# Altium PCB StuderA80ReproExtend_V0.2_RCA.PcbDoc
Units mil, origin at the board's own origin, x right, y up, seen from the top; angles counter-clockwise.
Board outline 8780 x 3200 mil, 2 copper layers (Top Layer, Bottom Layer); 6 components, 4 nets, 25 pads, 2 vias.
Unrouted connection lines stored in the file: 2.
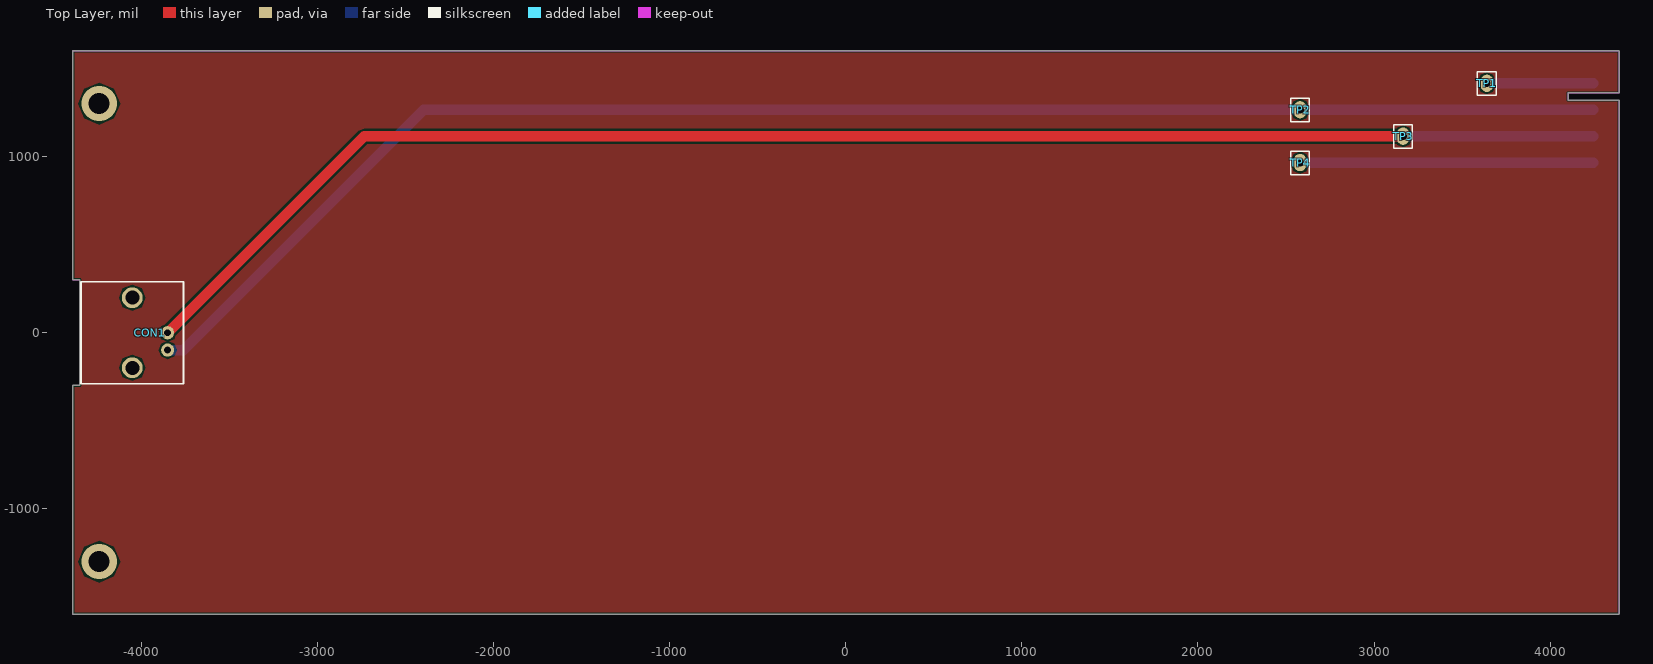
[diagram p0: Top Layer view]
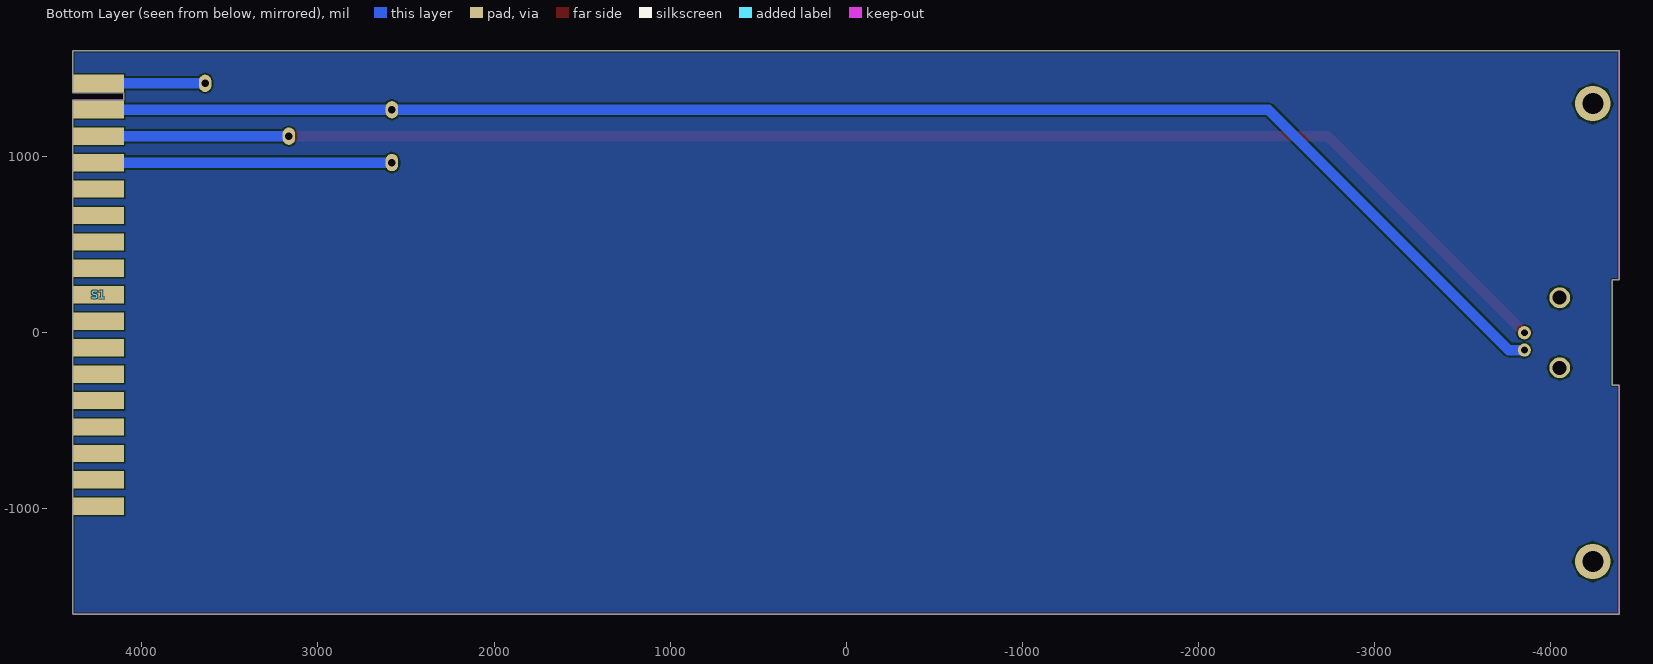
[diagram p1: Bottom Layer view, seen from below]

## Layer stack, top to bottom
Top Solder: solder mask 0.4, Solder Resist, Dk 3.5
Top Layer: signal copper 1.4
Dielectric 1: dielectric 12.6, FR-4, Dk 4.8
Bottom Layer: signal copper 1.4
Bottom Solder: solder mask 0.4, Solder Resist, Dk 3.5

## Board outline
-4388,-300 -4348,-300 -4348,300 -4388,300 -4388,1600 4388,1600 4392,1597 4392,1360 4102,1360 4102,1320 4392,1320 4392,-1597 4388,-1600 -4388,-1600

## Design rules (kind name [scope] priority, off if disabled: settings)
Clearance [All] p1: gap=10 ignorepadtopadclearanceinfootprint=FALSE except(0: Arc-Hole Track-Hole SMDPad-Hole THPad-Hole Via-Hole Fill-Hole Poly-Hole Region-Hole Text-Hole)
PolygonConnect [All] p1: connectstyle=Relief reliefconductorwidth=10 reliefentries=4 polygonreliefangle="90 Angle" airgapwidth=10
RoutingVias [All] p1: holewidth=28 width=50 viastyle="Through Hole" minholewidth=28 minwidth=50 maxholewidth=28 maxwidth=50
SolderMaskExpansion [All] p1: expansion=4
Width [All] p1: maxlimit=200 minlimit=10 preferedwidth=60
30 further rules are at their usual default settings.

## Components (designator, comment, footprint, x,y, rotation, side; value= is the part's Value field where it differs from the comment)
CON1 "RCA" RCA-RJ255 -4050,-1.18 r0 top
S1 "ReproInterface-1.080.986-12" ReproInterface 4245,214.21 r0 top
TP1 "TestPoint" TP-1.0mm 3640,1415 r0 top
TP2 "TestPoint" TP-1.0mm 2580,1265 r0 top
TP3 "TestPoint" TP-1.0mm 3165,1115 r0 top
TP4 "TestPoint" TP-1.0mm 2580,965 r0 top

## Footprints (in the part's own frame and the unit in brackets; to place one, negate y for a bottom-side part, rotate by r counter-clockwise, add the part's x,y. Pads: shape width x height; smd on the part's side, far side on the other; paste and mask are expansions set on the pad)
RCA-RJ255 [mm] "RCA Socket"
  round 1.9 hole 1: 1(5.1,0) 2(5.1,-2.5)
  round 3 hole 2.02: 2(0,-5.05) 2(0,5.05)
  silkscreen extent -7.4,-7.35 7.4,7.35
ReproInterface [mm] "Studer A80 RC Reproduce Card 1.080.986-12 Interface"
  rect 7.35x2.5 smd far side: 1(0,30.5) 2(0,26.688) 3(0,22.875) 4(0,19.062) 5(0,15.25) 6(0,11.438) 7(0,7.625) 8(0,3.812) 9(0,0) 10(0,-3.812) 11(0,-7.625) 12(0,-11.438) 13(0,-15.25) 14(0,-19.062) 15(0,-22.875) 16(0,-26.688) 17(0,-30.5)
TP-1.0mm [mm] "Test Point with 1.0mm hole"
  oval 1.8x2.5 hole 1.1: 1(0,0)
  silkscreen extent -1.37,-1.73 1.35,1.65

## Part data
CON1: "RCA Connector", Publisher="Altium Limited", Revision="17-Jul-2002: Re-released for DXP Platform."
S1: "Studer A80 RC Reproduce Card 1.080.986-12 Interface"

## Via types
v1: diameter 200, hole 120, Top Layer to Bottom Layer, 2 vias

## Nets (pads, with @x,y where several pads share a name; then routed paths per layer and width w, separated by ;. In a path a pad name is that pad's centre, name@x,y a point inside that pad or via, vN(x,y) a via of type N, cw(c..) or ccw(c..) an arc to the next point about the centre after c; other vN are vias at no path point)
NetCON1_1: CON1.1 S1.3 TP3.1 | length 8556.6
  Top Layer w60: CON1.1 -2733.03,1115 TP3.1
  Bottom Layer w60: TP3.1 4244.8,1115 S1.3
NetCON1_2: CON1.2 S1.2 TP2.1 | length 8659.5
  Bottom Layer w60: CON1.2@-3849.21,-99.61 -3759.61,-99.61 -2395,1265 TP2.1 4244.9,1265 S1.2
NetS1_1: S1.1 TP1.1 | length 605
  Bottom Layer w60: TP1.1 S1.1
NetS1_4: S1.4 TP4.1 | length 1665.1
  Bottom Layer w60: TP4.1 2580.3,964.7 S1.4
pads on no net: S1.5 S1.6 S1.7 S1.8 S1.9 S1.10 S1.11 S1.12 S1.13 S1.14 S1.15 S1.16 S1.17
copper on no net:
  other v1: -4238,-1300 -4238,1300

## Polygon pours and split planes (outlines as drawn)
no net on Top Layer "TOP-GND" (solid, pour order 4): -4388,1600 -4388,300 -4348,300 -4348,-300 -4388,-300 -4388,-1600 4389,-1600 4392,-1597 4392,1320 4102,1320 4102,1360 4392,1360 4392,1597 4391,1597 4388,1600
no net on Bottom Layer "B-GND" (solid, pour order 6): -4388,1600 -4388,300 -4348,300 -4348,-300 -4388,-300 -4388,-1600 4389,-1600 4392,-1597 4392,1320 4102,1320 4102,1360 4392,1360 4392,1597 4391,1597 4388,1600

## Keep-outs
Keep-Out Layer:
  lines w0.5: -4388,-1600 -4388,-300 -4348,-300 -4348,300 -4388,300 -4388,1600 4388,1600 4392,1597 4392,1368 4392,1365 4392,1360 4102,1360 4102,1320 4392,1320 4392,1316 4392,1313.4 4392,1310.4 4392,-1597 4388,-1600 -4388,-1600